# Altium PCB EtherWiz_RiscPC7K.PcbDoc (part 2 of 2)
Units mil, origin at the board's own origin, x right, y up, seen from the top; angles counter-clockwise.
Board outline 2881.89 x 2411.42 mil, 4 copper layers (Top Layer, 5V, GND, Bottom Layer), stack 81.148 mil thick; 69 components, 129 nets, 423 pads, 162 vias.
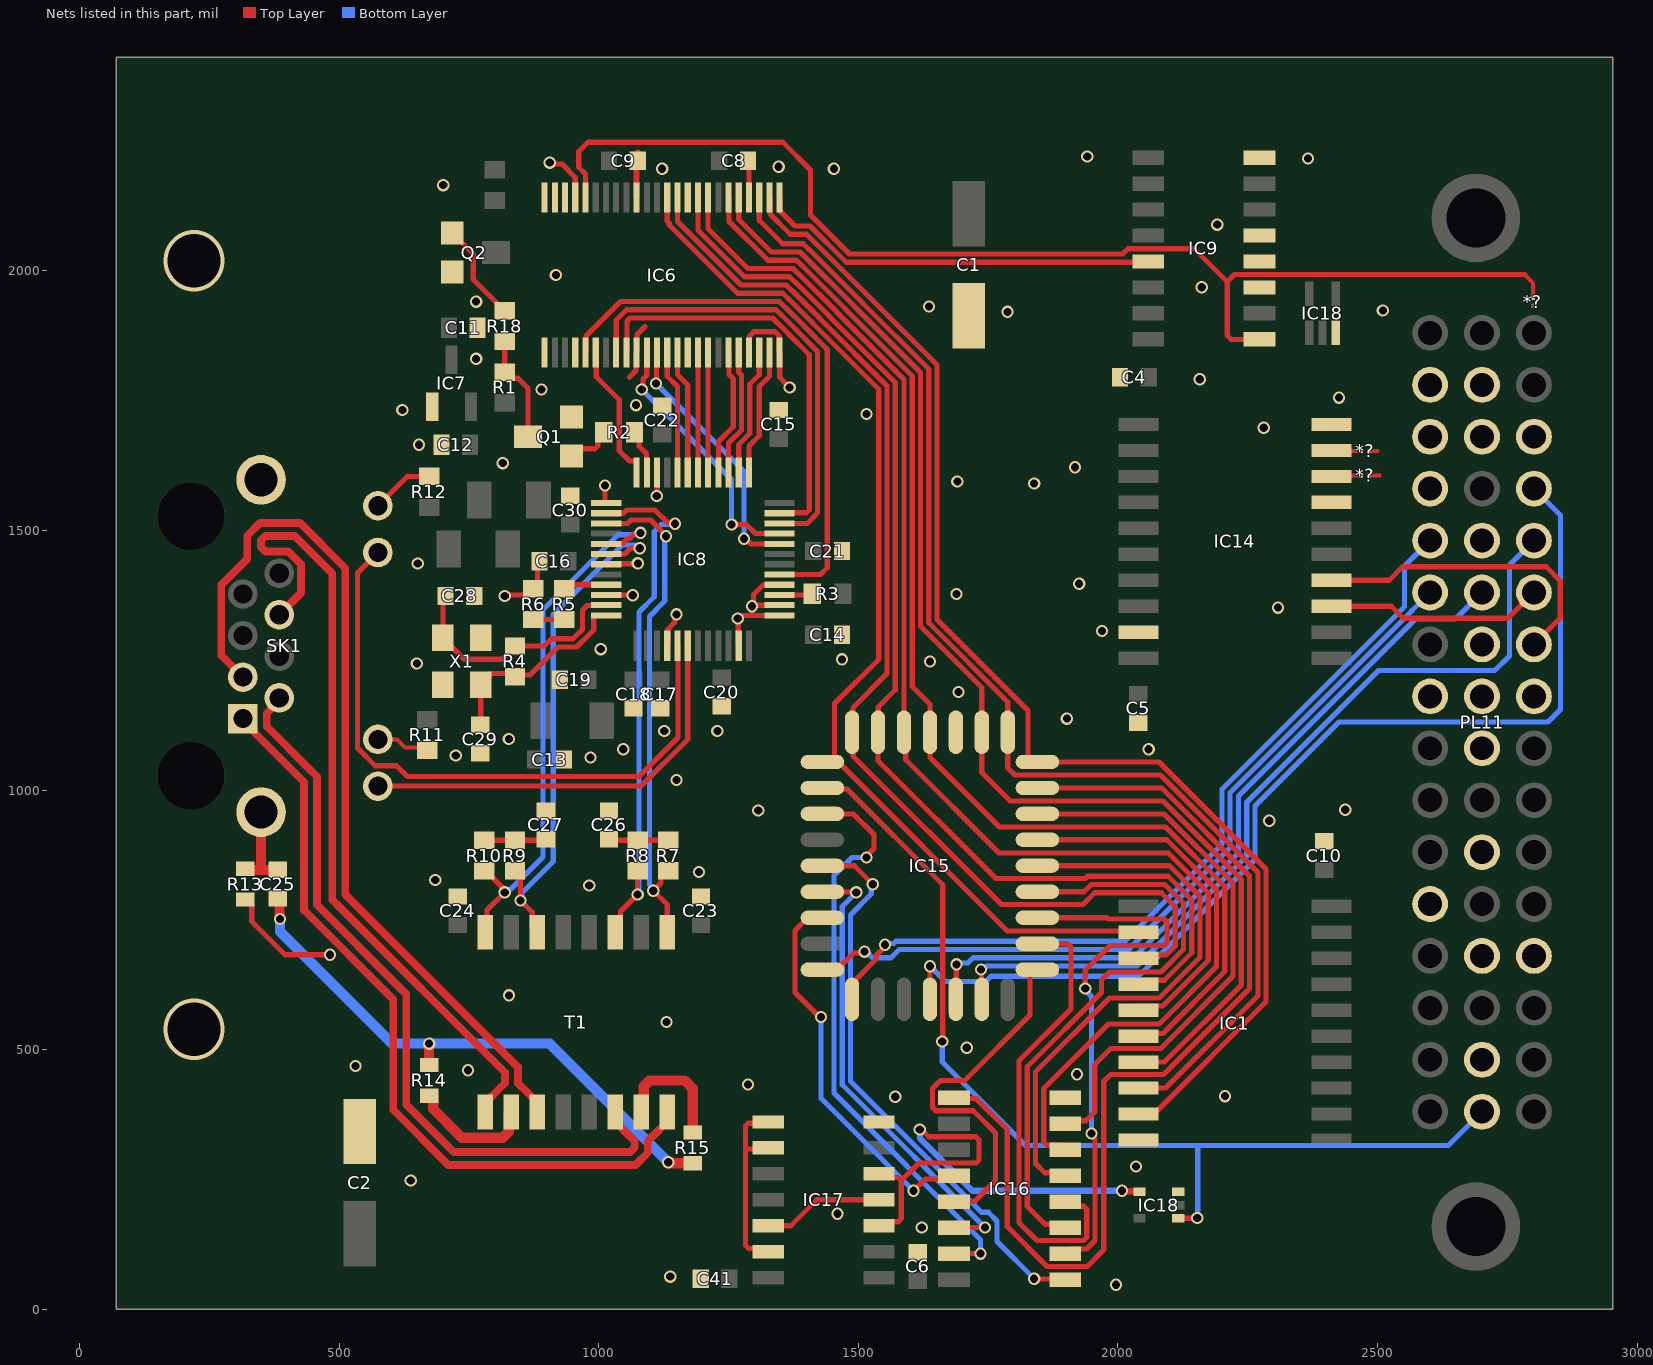
[diagram p4: the nets of this part, all layers, seen from the top]

## Via types
v1: diameter 23.62, hole 15.75, Top Layer to Bottom Layer, tented both sides, 160 vias
v2: diameter 118.11, hole 102.36, Top Layer to Bottom Layer, 2 vias

## Nets (pads, with @x,y where several pads share a name; then routed paths per layer and width w, separated by ;. In a path a pad name is that pad's centre, name@x,y a point inside that pad or via, vN(x,y) a via of type N, cw(c..) or ccw(c..) an arc to the next point about the centre after c; other vN are vias at no path point) (continued)
D0: IC1.9 IC6.2 IC15.13 | length 2447.8
  Top Layer w10: IC6.2@1328.74,2141.26 1329.65,2140.35 1329.65,2109.68 1368.61,2070.71 1400.03,2070.71 1453.87,2016.86 1651.42,1819.32 1651.42,1328.9 1826.77,1153.54 1826.77,1062.44 1834.88,1054.33 2078.93,1054.33 2285.35,847.9 2285.35,592.44 2074.03,381.12 IC1.9@2031.51,381.12
D1: IC1.8 IC6.3 IC15.14 | length 2426.3
  Top Layer w10: IC6.3@1309.06,2141.26 1309.06,2097.87 1354.33,2052.6 1393.86,2052.6 1404.47,2041.99 1405.04,2041.99 1507.48,1939.55 1507.48,1938.98 1635.51,1810.95 1635.51,1322.31 1787.8,1170.03 IC15.14@1787.8,1111.54 1787.8,1042.91 1801.69,1029.02 2081.75,1029.02 2269.45,841.32 2269.45,604.09 2091.54,426.18 IC1.8@2039.37,426.18
D2: IC1.7 IC6.5 IC15.15 | length 2395
  Top Layer w10: IC6.5@1269.69,2141.26 1269.69,2099.27 1332.26,2036.69 1387.27,2036.69 1397.88,2026.08 1398.46,2026.08 1491.57,1932.96 1491.57,1932.39 1619.61,1804.36 1619.61,1315.72 1737.8,1197.53 IC15.15@1737.8,1111.54 1737.8,1033.86 1792.64,979.02 2086.76,979.02 2237.64,828.14 2237.64,624.66 2089.16,476.18 IC1.7@2026.57,476.18
D3: IC1.6 IC6.6 IC15.17 | length 2324.5
  Top Layer w10: IC6.6@1250,2141.26 1250.91,2140.35 1250.91,2095.55 1325.67,2020.79 1380.68,2020.79 1391.29,2010.18 1391.87,2010.18 1475.67,1926.38 1475.67,1925.8 1603.7,1797.77 1603.7,1199.45 1637.8,1165.35 IC15.17@1637.8,1111.54 1637.99,1111.34 1637.99,1062.8 1771.65,929.13 2091.66,929.13 2205.83,814.96 2205.83,650.71 2086.53,531.41 2044.6,531.41 IC1.6@2039.37,526.18
D4: IC1.5 IC6.8 IC15.18 | length 2287
  Top Layer w10: IC6.8@1210.63,2141.26 1210.63,2081.26 1287.01,2004.88 1374.1,2004.88 1384.71,1994.27 1385.28,1994.27 1458.86,1920.69 1458.86,1920.12 1587.8,1791.18 IC15.18@1587.8,1111.54 1591.16,1108.18 1591.16,1058.45 1770.59,879.02 2096.79,879.02 2174.02,801.79 2174.02,671.73 2086.26,583.98 IC1.5@2034.37,583.98
D5: IC1.4 IC6.9 IC15.19 | length 2261.1
  Top Layer w10: IC6.9@1190.94,2141.26 1190.94,2078.45 1280.42,1988.98 1367.51,1988.98 1378.12,1978.37 1378.69,1978.37 1442.95,1914.11 1442.95,1913.53 1571.18,1785.3 1571.18,1193.23 1538.11,1160.15 1538.11,1111.85 IC15.19@1537.8,1111.54 1537.8,1056.69 1764.84,829.65 1937.53,829.65 1941.98,834.09 2011.12,834.09 2083.18,834.09 2096.72,834.09 2142.2,788.61 2142.2,775.07 2142.2,686.88 2089.3,633.98 2034.37,633.98 IC1.4@2032.09,631.7
D6: IC1.3 IC6.11 IC15.20 | length 2243
  Top Layer w10: IC6.11@1151.57,2141.26 1151.57,2095.33 1273.83,1973.07 1360.92,1973.07 1371.53,1962.46 1372.1,1962.46 1427.05,1907.52 1427.05,1906.94 1555.28,1778.71 1555.28,1224.57 1489.48,1158.78 1489.48,1113.22 IC15.20@1487.8,1111.54 1490.15,1109.18 1490.15,1064.96 1775.47,779.65 1932.52,779.65 1955.16,802.28 2083.54,802.28 2110.39,775.43 2110.39,700.06 2092.76,682.42 IC1.3@2032.81,682.42
D7: IC1.2 IC6.12 IC15.21 | length 2076.1
  Top Layer w10: IC6.12@1131.89,2141.26 1131.89,2096.35 1135.67,2092.57 1135.67,2088.74 1267.24,1957.17 1354.33,1957.17 1364.94,1946.55 1365.52,1946.55 1411.14,1900.93 1411.14,1900.35 1539.37,1772.13 1539.37,1251.97 1454.02,1166.61 1454.02,1062.44 1445.9,1054.33 IC15.21@1430.79,1054.33 ; IC15.21@1445.9,1051.09 1464.66,1051.09 1786.73,729.02 2023.74,729.02 IC1.2@2026.57,726.18
ERX_N: IC8.5 R10.2 T1.8 | length 1053.8
  Top Layer w10: R10.2@779.53,844.49 782.48,844.49 816.29,810.68 816.29,805.76 v1(818.9,803.15) 784.73,768.98 784.73,729.42 T1.8@781.69,726.38 ; IC8.5@1014.25,1474.41 1015.16,1475.31 1045.84,1475.31 1054.01,1483.49 1058.4,1483.49 1067.9,1492.99 1077.81,1492.99 v1(1080.42,1495.6)
  Bottom Layer w10: v1(818.9,803.15) 822.58,803.15 828.78,809.35 830.62,809.35 892.47,871.2 892.47,1347.44 1036.99,1491.96 1066.86,1491.96 1067.9,1492.99 1077.81,1492.99 v1(1080.42,1495.6)
ERX_P: IC8.6 R9.2 T1.6 | length 1001.8
  Top Layer w10: R9.2@840.94,839.41 842.38,839.41 849.04,832.76 v1(849.04,787.69) 871.73,764.99 871.73,736.34 T1.6@881.69,726.38 ; IC8.6@1014.25,1454.72 IC8.6@1014.25,1454.72 1050.35,1454.78 1061.35,1465.78 1078.6,1465.78 v1(1078.93,1466.11)
  Bottom Layer w10: v1(849.04,787.69) 851.64,790.29 851.64,802.09 912.47,862.91 912.47,1339.15 1045.27,1471.96 1069.4,1471.96 1075.25,1466.11 v1(1078.93,1466.11)
ETX_N: IC8.2 R8.2 T1.3 | length 1040.3
  Top Layer w10: IC8.2@1014.25,1533.46 1047.66,1533.46 1054.05,1539.85 1107.74,1539.85 1133.17,1514.42 1145.35,1514.42 v1(1146.61,1513.16) ; T1.3@1031.69,726.38 1041.65,736.33 1041.65,766.06 v1(1074.8,799.21) R8.2@1074.8,844.49
  Bottom Layer w10: v1(1074.8,799.21) 1077.41,801.82 1077.41,1342.86 1106.93,1372.38 1106.93,1498.4 1120.24,1511.71 1145.17,1511.71 v1(1146.61,1513.16)
ETX_P: IC8.3 R7.2 T1.1 | length 973.2
  Top Layer w10: IC8.3@1014.25,1513.78 1055.82,1513.78 1062.21,1520.17 1099.58,1520.17 1118.86,1500.89 1118.86,1500.75 1129.65,1489.96 v1(1129.65,1488.99) ; T1.1@1131.69,726.38 1131.69,779.76 v1(1105.07,806.38) 1119.7,821.01 1119.7,832.76 1131.43,844.49 R7.2@1133.86,844.49
  Bottom Layer w10: v1(1105.07,806.38) 1105.07,810.07 1097.41,817.73 1097.41,1334.57 1126.93,1364.09 1126.93,1476.64 1127.04,1476.75 1127.04,1486.39 v1(1129.65,1488.99)
GND: *?.1@2483.5,1606.3 *?.1@2483.5,1653.54 C1.2 C2.2 C4.1 C5.1 C6.1 C8.1 C9.1 C10.1 C11.1 C12.1 C13.1 C14.1 C15.1 C16.1 C17.1 C18.1 C19.1 C20.1 C21.1 C22.1 C23.1 C24.1 C26.1 C27.1 C28.1 C29.1 C30.1 C41.1 IC1.10 IC6.4 IC6.10 IC6.15 IC6.21 IC6.22 IC6.23 IC6.24 IC6.25 IC6.28 IC6.34 IC6.39 IC6.45 IC6.48 IC7.1 IC8.1 IC8.7 IC8.10 IC8.16 IC8.23 IC8.25 IC8.26 IC8.28 IC8.46 IC9.3 IC9.4 IC9.5 IC9.8 IC14.10 IC14.19 IC15.16 IC16.8 IC17.7 IC18.3 PL11.B2 PL11.B5 PL11.B7 PL11.B9 PL11.B11 PL11.B13 PL11.B15 Q1.2 Q2.2 R6.1 R13.1 X1.2 X1.4 | length 1499
  Top Layer w7.87: *?.1@2483.5,1606.3 2503.94,1606.3 ; *?.1@2483.5,1653.54 2500,1653.54
  Top Layer w10: R13.1@318.9,789.37 322.83,789.37 331.61,780.59 331.61,747.13 395.74,683 v1(482.21,683) ; v1(818.9,1374.02) 820.94,1376.06 862.28,1376.06 R6.1@874.02,1387.8 881.89,1395.67 C16.1@881.89,1440.94 ; v1(905.51,2208.66) 908.12,2206.05 928.93,2206.05 954.72,2180.26 IC6.21@954.72,2141.26 ; v1(1011.81,1586.61) 1011.81,1554.06 1012.72,1553.15 IC8.1@1014.25,1553.15 ; IC8.10@1014.25,1375.98 1014.57,1375.66 1065.26,1375.66 v1(1065.59,1375.34) ; IC8.7@1014.25,1435.04 1015.14,1435.93 1074.35,1435.93 v1(1075.24,1436.81) ; 1059.06,1795.28 1071.93,1808.15 1071.93,1842.09 IC6.34@1072.83,1842.99 1073.74,1843.9 1073.74,1877.93 1088.96,1893.15 ; v1(1111.75,1566.74) 1111.98,1566.97 1111.98,1611.51 IC8.46@1112.2,1611.73 ; IC8.16@1131.89,1278.03 1132.8,1278.94 1132.8,1309.62 1147,1323.82 1147,1335.98 v1(1149.61,1338.58) ; IC8.23@1269.69,1278.03 1268.78,1278.94 1268.78,1329.65 v1(1267.72,1330.71) 1271.4,1330.71 1277.31,1336.61 1295.28,1336.61 ; C8.1@1287.4,2212.6 1289.37,2210.63 IC6.4@1289.37,2141.26 ; IC6.45@1289.37,1842.99 1290.28,1843.9 1290.28,1874.58 1298.63,1882.93 1339.16,1882.93 1347.52,1874.58 1347.52,1843.9 IC6.48@1348.43,1842.99 1348.43,1794.67 v1(1367.57,1775.53) ; IC8.25@1347.95,1336.61 1295.28,1336.61 ; IC8.26@1347.95,1356.3 1297.24,1356.3 v1(1295.28,1354.33) ; IC8.28@1347.95,1395.67 1347.05,1394.76 1316.37,1394.76 1297.88,1376.28 1297.88,1356.94 v1(1295.28,1354.33) ; 1295.28,1336.61 v1(1295.28,1354.33)
  Top Layer w11.81: IC6.15@1072.83,2141.26 C9.1@1072.83,2214.57 ; C9.1@1074.8,2228.35 C9.1@1080.71,2222.44
  other v1: 1996.06,47.24 1137.8,62.99 1622.05,157.48 1459.72,183.96 637.8,248.03 2034.75,275.31 1570.87,409.45 2205.95,410.63 1287.4,433.07 1921.26,452.76 748.03,460.63 531.5,468.5 1708.66,503.94 1130.27,553.61 827.12,604.79 981.54,816.15 685.04,826.77 1192.91,842.52 2291.34,940.94 1307.09,960.63 2437.64,962.13 1149.61,1019.68 984.25,1062.99 724.41,1066.93 1047.24,1078.74 2059.06,1078.74 826.77,1098.43 1125.98,1114.17 1228.35,1114.17 1901.57,1137.8 1692.91,1188.98 649.61,1244.09 1637.8,1248.03 1468.5,1251.97 1003.94,1271.65 1969.1,1306.67 2308.32,1351.58 1688.98,1377.95 1925.2,1397.64 651.35,1436.51 1838.58,1590.55 1690.63,1594.67 1917.32,1622.05 814.96,1629.92 653.54,1665.35 2280.76,1698.04 1515.55,1724.41 621.68,1732.24 1071.49,1741.58 2425.79,1756.01 889.76,1771.65 2157.48,1791.34 763.78,1830.71 1787.4,1921.26 2510.21,1923.87 1636.2,1931.74 763.78,1940.94 2161.42,1968.5 917.32,1992.13 2191.32,2089.22 700.42,2165.31 1122.05,2196.85 1452.76,2196.85 1346.46,2200.79 2366.14,2216.54 1940.94,2220.47
GND_CHASS: C25.1 R13.2 SK1.S1 SK1.S2 | length 159.6
  Top Layer w19.68: R13.2@316.93,846.46 349.61,846.46 358.27,846.46 C25.1@374.02,846.46 ; 349.61,855.12 SK1.S2@349.61,957.68
  other v2: 220.47,539.37 220.47,2019.69
INT_3v3: Q2.1 R18.2 | length 193.3
  Top Layer w10: Q2.1@717.84,2072.93 758.27,2032.51 758.27,1983.86 804.21,1937.91 804.21,1934.96 815.94,1923.23 R18.2@818.9,1923.23
INT_Read_nEN: 
LA2: IC14.3 PL11.C6 | length 420
  Top Layer w10: IC14.3@2411.42,1354.33 2526.22,1354.33 2549.5,1331.05 2751.52,1331.05 PL11.C6@2801.18,1380.71
LA3: IC14.4 PL11.C7 | length 606
  Top Layer w10: IC14.4@2411.42,1404.33 2522.44,1404.33 2548.31,1430.2 2824.87,1430.2 2852.06,1403.01 2852.06,1331.59 PL11.C7@2801.18,1280.71
LA4: IC15.29 PL11.A6 | length 1543.4
  Top Layer w10: IC15.29@1430.79,654.33 1459.02,654.33 1491.06,686.37 1509.2,686.37 v1(1511.81,688.98)
  Bottom Layer w10: v1(1511.81,688.98) 1515.5,688.98 1527.31,677.17 1562.99,677.17 1578.9,693.07 1733.54,693.07 1733.7,693.23 2020.16,693.23 2216.06,889.13 2216.06,995.04 2566,1344.97 2566,1345.52 PL11.A6@2601.18,1380.71
LA5: IC15.3 PL11.C5 | length 1628.2
  Top Layer w10: v1(1736.22,654.45) 1737.01,653.66 1737.01,597.91 IC15.3@1737.8,597.13
  Bottom Layer w10: v1(1736.22,654.45) 1739.91,654.45 1746.88,661.42 2036.56,661.42 2247.87,872.73 2247.87,976.22 2279.37,1007.72 2502.03,1230.38 2725.63,1230.38 2753.91,1258.65 2753.91,1433.43 PL11.C5@2801.18,1480.71
LA6: IC15.2 PL11.B6 | length 1440.6
  Top Layer w10: IC15.2@1687.8,597.13 1688.39,597.72 1688.39,663.86 v1(1688.98,664.45)
  Bottom Layer w10: v1(1688.98,664.45) 1691.58,667.06 1710.68,667.06 1720.79,677.17 1740.13,677.17 1740.29,677.32 2029.97,677.32 2231.97,879.32 2231.97,988.45 2573.14,1329.62 2650.09,1329.62 PL11.B6@2701.18,1380.71
LA7: IC15.30 PL11.A5 | length 1611.5
  Top Layer w10: IC15.30@1487.8,597.13 1487.8,627.77 1534.19,674.17 1534.19,681.49 1551.18,698.48 v1(1551.18,702.17)
  Bottom Layer w10: v1(1551.18,702.17) 1553.79,704.77 1568.1,704.77 1572.31,708.98 1726.95,708.98 1727.11,709.13 2013.57,709.13 2200.16,895.72 2200.16,1001.63 2551.98,1353.45 2551.98,1431.51 PL11.A5@2601.18,1480.71
LA8: IC15.1 PL11.C4 | length 2014.6
  Top Layer w10: IC15.1@1637.8,597.13 v1(1637.81,660.92)
  Bottom Layer w10: v1@1637.8,661.42 1660.96,638.26 1667.48,631.73 1745.63,631.73 1755.63,641.73 2039.37,641.73 2263.78,866.14 2263.78,969.63 2425.73,1131.58 2828.44,1131.58 2852.27,1155.41 2852.27,1529.62 PL11.C4@2801.18,1580.71
LA9: PL11.A4
LA12: *?.2@2468.5,1653.54 IC14.9 | length 57.4
  Top Layer w7.87: IC14.9@2412.2,1653.54 *?.2@2468.5,1653.54
  Top Layer w10: IC14.9@2411.42,1654.33 IC14.9@2412.2,1653.54
LA13: *?.2@2468.5,1606.3 IC14.8 | length 57.9
  Top Layer w7.87: IC14.8@2413.39,1606.3 *?.2@2468.5,1606.3
  Top Layer w10: IC14.8@2411.42,1604.33 IC14.8@2413.39,1606.3
LINK: IC8.17 SK1.11 | length 1241.2
  Top Layer w10: SK1.11@574.57,1457.76 535.16,1418.35 535.16,1081.43 569.42,1047.17 610.32,1047.17 631.42,1026.06 1077.24,1026.06 1152.48,1101.3 1152.48,1277.13 IC8.17@1151.57,1278.03
NetC25_2: C25.2 R14.1 R15.1 | length 1086.3
  Top Layer w19.68: C25.2@381.89,791.34 385.07,788.15 385.07,752.72 v1(385.83,751.97) ; R14.1@673.23,470.47 v1(673.23,511.81) ; v1(1133.86,283.46) 1134.92,283.46 1136.89,281.5 R15.1@1181.1,281.5
  Bottom Layer w19.68: v1(385.83,751.97) 385.83,728.35 602.36,511.81 v1(673.23,511.81) 905.51,511.81 v1(1133.86,283.46)
NetC26_2: C26.2 R7.1 R8.1 | length 118.9
  Top Layer w10: C26.2@1015.75,905.51 1017.72,903.54 R8.1@1074.8,903.54 R7.1@1133.86,903.54
NetC27_2: C27.2 R9.1 R10.1 | length 102.4
  Top Layer w10: R10.1@779.53,903.54 830.71,903.54 C27.2@881.89,903.54
NetC28_2: C28.2 IC8.11 R4.2 X1.1 | length 481
  Top Layer w10: C28.2@704.72,1374.02 699.8,1369.09 X1.1@699.8,1293.31 741.14,1251.97 812.99,1251.97 823.9,1262.87 823.9,1265.83 835.63,1277.56 894.98,1277.56 908.91,1291.5 950.62,1291.5 968.5,1309.38 968.5,1346.46 977.44,1355.39 1013.35,1355.39 IC8.11@1014.25,1356.3
NetC29_2: C29.2 IC8.12 R4.1 X1.3 | length 397.9
  Top Layer w10: C29.2@771.65,1125.98 772.64,1126.97 772.64,1207.68 788.31,1223.35 793.1,1223.35 794.16,1224.41 832.68,1224.41 R4.1@838.58,1218.5 841.82,1221.74 867.41,1221.74 921.26,1275.59 957.21,1275.59 990.22,1308.6 990.22,1335.71 991.12,1336.61 IC8.12@1014.25,1336.61
NetIC8_9: IC8.9 R5.2 | length 84.4
  Top Layer w10: R5.2@933.07,1387.8 940.94,1395.67 IC8.9@1014.25,1395.67
NetIC8_27: IC8.27 R3.1 | length 68.2
  Top Layer w10: IC8.27@1347.95,1375.98 1413.39,1375.98 R3.1@1415.35,1374.02
NetIC8_47: IC8.47 R2.1 | length 89.2
  Top Layer w10: R2.1@1062.99,1687.01 1065.94,1687.01 1077.68,1675.28 1077.68,1662.48 1091.61,1648.54 1091.61,1612.64 IC8.47@1092.52,1611.73
NetIC17_3: IC17.3 IC17.5 IC18.4@2041.34,226.38 | length 980.1
  Top Layer w10: IC17.3@1539.86,161.02 1547.66,168.82 1576.82,168.82 1582.68,174.68 1582.68,248.03 ; IC17.5@1539.86,261.02 1546.96,253.92 1576.79,253.92 1582.68,248.03 ; v1(1618.11,346.46) 1621.8,346.46 1635.65,332.6 1726.43,332.6 1732.28,326.74 1732.28,287.83 1726.43,281.97 1616.61,281.97 1582.68,248.03
  Top Layer w11.81: v1(2007.87,228.35) 2008.86,227.36 2040.35,227.36 IC18.4@2041.34,226.38
  Bottom Layer w11.81: v1(1618.11,346.46) 1618.82,345.75 1618.82,329.03 1719.5,228.35 v1(2007.87,228.35)
NetIC17_4: IC17.4 IC17.12 | length 234.3
  Top Layer w10: IC17.12@1326.32,161.02 1369.68,161.02 1419.68,211.02 IC17.4@1539.86,211.02
NetIC17_8: IC17.8 IC17.9 IC17.13 | length 369.8
  Top Layer w10: IC17.13@1326.32,111.02 1319.92,117.43 1288.69,117.43 1282.83,123.28 1282.83,309.1 ; IC17.9@1326.32,311.02 1324.4,309.1 1282.83,309.1 ; IC17.8@1326.32,361.02 1323.56,358.27 1287.4,358.27 1282.83,353.7 1282.83,309.1
NetQ1_1: Q1.1 R2.2 | length 90.7
  Top Layer w10: Q1.1@947.92,1640.07 947.92,1640.89 964.51,1657.48 992.13,1657.48 998.11,1663.46 998.11,1677.24 R2.2@1009.84,1688.98
NetQ1_3: Q1.3 R1.1 R18.1 | length 209.9
  Top Layer w10: R18.1@818.9,1864.17 R1.1@818.9,1805.12 830.63,1793.39 844.41,1793.39 863.51,1774.28 Q1.3@863.51,1680.85
NetR5_1: R5.1 R6.2 | length 59.1
  Top Layer w10: R6.2@874.02,1328.74 R5.1@933.07,1328.74
NetR11_1: R11.1 SK1.10 | length 103.4
  Top Layer w7.87: SK1.10@574.57,1097.76 610.91,1097.76 626.66,1082 664.06,1082 R11.1@669.29,1076.77
NetR12_1: R12.1 SK1.12 | length 122.1
  Top Layer w10: SK1.12@574.57,1547.76 631.14,1604.33 R12.1@673.23,1604.33
NetR14_2: R14.2 T1.10 | length 244
  Top Layer w19.68: R14.2@673.23,411.42 677.17,411.42 681.1,407.48 681.1,385.83 736.22,330.71 815.04,330.71 826.57,342.24 826.57,374.8 T1.10@831.69,379.92
NetR15_2: R15.2 T1.15 | length 241.8
  Top Layer w19.68: T1.15@1081.69,379.92 1086.81,385.04 1086.81,429.41 1098.34,440.94 1165.35,440.94 1181.1,425.2 R15.2@1181.1,340.55
PR/W: IC14.7
Psp1: PL11.C13
Psp2: PL11.A12
Psp3: PL11.A8
Psp4: PL11.B8
Psp5: PL11.C8
Psp6: PL11.A3
Psp7: PL11.B3
Psp8: PL11.C3
Ready: PL11.A2
ROM_Latch_nEN: 
ROM_Latch_nSel: 
ROM_nCS: IC15.22 IC18.1@2116.14,175.2 PL11.B16 | length 1959.4
  Top Layer w10: IC15.22@1430.79,1004.33 1432.65,1002.46 1477.85,1002.46 1662.48,817.83 1662.48,516.81 v1(1661.42,515.75) ; IC18.1@2116.14,175.2 2116.42,175.48 2152.41,175.48 v1(2152.69,175.76)
  Bottom Layer w10: v1(1661.42,515.75) 1661.42,476.38 1821.93,315.87 2153.54,315.87 ; v1@2153.54,177.17 2153.54,315.87 ; PL11.B16@2701.18,380.71 2636.34,315.87 2153.54,315.87
ROMA0: IC15.12 IC16.9 | length 1920.8
  Top Layer w10: IC16.9@1684.06,407.28 1685.13,406.21 1726.52,406.21 1786.58,346.15 1786.58,159.61 1863.59,82.6 1940.87,82.6 1972.44,114.17 1972.44,438.65 1986.27,452.48 2087.95,452.48 2253.54,618.07 2253.54,628.76 2253.54,834.73 2084.33,1003.94 1845.2,1003.94 IC15.12@1844.8,1004.33
ROMA1: IC15.11 IC16.7 | length 1105.9
  Top Layer w10: IC15.11@1844.8,954.33 2088.95,954.33 2221.73,821.55 2221.73,641.94 2082.27,502.48 1986.27,502.48 1955.2,471.41 1955.2,380.4 1938.11,363.3 1904.64,363.3 IC16.7@1898.62,357.28
ROMA2: IC15.10 IC16.6 | length 1114.1
  Top Layer w10: IC15.10@1844.8,904.33 2093.96,904.33 2189.92,808.37 2189.92,660.13 2079.67,549.88 1981.51,549.88 1857.2,425.58 1857.2,321.92 1863.06,316.06 1889.84,316.06 IC16.6@1898.62,307.28
ROMA3: IC15.9 IC16.5 | length 1106.8
  Top Layer w10: IC15.9@1844.8,854.33 2098.98,854.33 2158.11,795.2 2158.11,678.32 2079.67,599.88 1983.67,599.88 1841.3,457.51 1841.3,280.75 1858.97,263.08 1892.83,263.08 IC16.5@1898.62,257.28
ROMA4: IC15.8 IC16.3 | length 1158.9
  Top Layer w10: IC15.8@1844.8,804.33 1934.71,804.33 1948.57,818.19 2004.53,818.19 2076.6,818.19 2090.13,818.19 2126.3,782.02 2126.3,768.49 2126.3,693.47 2082.71,649.88 1983.67,649.88 1968.5,634.71 1968.5,610.24 1825.39,467.13 1825.39,198.23 1859.73,163.89 1892.01,163.89 IC16.3@1898.62,157.28
ROMA5: IC15.7 IC16.2 | length 1068.6
  Top Layer w10: IC15.7@1844.8,754.33 1978.76,754.33 1981.12,751.97 2088.63,751.97 2094.49,746.11 2094.49,706.65 2088.63,700.79 1984.58,700.79 1937.01,653.22 v1(1937.01,618.11) ; IC16.2@1898.62,107.28 1907.4,116.06 1939.61,116.06 1955.94,132.4 1955.94,327.77 1948.82,334.9 v1(1948.82,338.58)
  Bottom Layer w10: v1(1937.01,618.11) 1937.01,614.42 1948.82,602.61 v1(1948.82,338.58)
ROMA6: IC15.6 IC16.4 | length 888.6
  Top Layer w10: IC15.6@1844.8,704.33 1903.59,704.33 1909.45,698.47 1909.45,578.74 1809.49,478.78 1809.49,166.89 1843.78,132.6 1933.65,132.6 1940.04,138.99 1940.04,192.65 1934.18,198.5 1907.4,198.5 IC16.4@1898.62,207.28
ROMA7: IC15.5 IC16.13 | length 710.4
  Top Layer w10: IC16.13@1684.06,207.28 1684.73,207.96 1723.71,207.96 1764.09,248.35 1764.09,339.92 1721.41,382.6 1649.03,382.6 1642.64,388.99 1642.64,425.58 1658,440.94 1704.72,440.94 1830.71,566.93 1830.71,646.22 1838.82,654.33 IC15.5@1844.8,654.33
ROMA8: IC15.27 IC16.12 | length 750.6
  Top Layer w10: v1(1428.23,562.99) 1425.2,562.99 1377.87,610.32 1377.87,729.65 1402.56,754.33 IC15.27@1430.79,754.33 ; v1(1606.3,228.35) 1629.07,251.12 1677.89,251.12 IC16.12@1684.06,257.28
  Bottom Layer w10: v1(1428.23,562.99) 1428.23,406.42 v1(1606.3,228.35)
ROMA9: IC15.26 IC16.14 | length 896.9
  Top Layer w10: IC15.26@1430.79,804.33 1431.38,803.74 1495.47,803.74 v1(1496.06,803.15) ; IC16.14@1684.06,157.28 1684.15,157.38 1744,157.38 v1(1744.09,157.48)
  Bottom Layer w10: v1(1496.06,803.15) 1468.82,775.91 1468.82,432.76 v1(1744.09,157.48)
ROMA10: IC15.23 IC16.15 | length 1139.4
  Top Layer w10: IC15.23@1430.79,954.33 1490.21,954.33 1529.91,914.64 1529.91,887.92 1515.75,873.76 v1(1515.75,870.08) ; IC16.15@1684.06,107.28 v1(1735.24,107.28)
  Bottom Layer w10: v1(1515.75,870.08) 1487.56,870.08 1452.91,835.43 1452.91,416.54 1735.24,134.21 v1(1735.24,107.28)
ROMA11: IC15.25 IC16.1 | length 1104
  Top Layer w10: IC15.25@1430.79,854.33 1492.13,854.33 v1(1527.56,818.9) ; v1(1838.58,59.06) 1839.47,58.17 1897.74,58.17 IC16.1@1898.62,57.28
  Bottom Layer w10: v1(1527.56,818.9) 1524.95,816.29 1524.95,799.91 1484.72,759.69 1484.72,439.34 1737.2,186.86 1750.14,186.86 1766.81,170.2 1766.81,130.83 v1(1838.58,59.06)
RX_N: SK1.6 T1.9 | length 1580.3
  Top Layer w15: SK1.6@384.57,1337.76 426.48,1379.67 426.48,1435.12 401.93,1459.67 357.92,1459.67 349.13,1468.45 349.13,1480.88 357.92,1489.67 414.35,1489.67 486.81,1417.21 486.81,788.78 501.46,774.13 819.19,456.4 819.19,435.58 810.41,426.79 810.06,426.79 781.69,398.43 T1.9@781.69,379.92
RX_P: SK1.3 T1.11 | length 1746.7
  Top Layer w15: SK1.3@314.57,1217.76 272.66,1259.67 272.66,1395.12 322.83,1445.29 322.83,1489.94 347.56,1514.67 424.71,1514.67 511.81,1427.56 511.81,799.13 844.19,466.75 844.19,435.58 852.98,426.79 853.33,426.79 881.69,398.43 T1.11@881.69,379.92
SPEED: IC8.18 SK1.9 | length 814.3
  Top Layer w10: SK1.9@574.57,1007.76 1081.43,1007.76 1171.26,1097.59 IC8.18@1171.26,1278.03
TX_N: SK1.2 T1.14 | length 1470
  Top Layer w15: SK1.2@384.57,1177.76 384.57,1172.13 360.4,1147.96 360.4,1122.85 442.82,1040.43 457.46,1025.79 457.46,778.76 614.31,621.91 628.96,607.26 628.96,394.67 720.57,303.05 1060.41,303.05 1069.19,311.84 1069.19,324.26 1060.41,333.05 1060.06,333.05 1031.69,361.42 T1.14@1031.69,379.92
TX_P: SK1.1 T1.16 | length 1511.4
  Top Layer w15: SK1.1@314.57,1137.76 335.4,1116.92 335.4,1112.49 432.46,1015.43 432.46,768.4 603.96,596.91 603.96,384.31 710.22,278.05 1070.76,278.05 1094.19,301.48 1094.19,324.26 1102.98,333.05 1103.33,333.05 1131.69,361.42 T1.16@1131.69,379.92
Wiz5_PR/W: IC6.1 IC9.13 | length 776.6
  Top Layer w10: IC6.1@1348.43,2141.26 1349.33,2140.35 1349.33,2115.24 1377.95,2086.61 1406.62,2086.61 1476.48,2016.75 2056.51,2016.75 IC9.13@2058.07,2018.31
Wiz_A0: IC6.36 IC8.32 | length 502.2
  Top Layer w10: v1(1110.24,1783.46) 1111.3,1784.53 1111.3,1842.09 IC6.36@1112.2,1842.99 ; v1(1279.53,1484.25) 1283.21,1484.25 1293.06,1474.41 IC8.32@1347.95,1474.41
  Bottom Layer w10: v1(1110.24,1783.46) 1279.53,1614.17 v1(1279.53,1484.25)
Wiz_A1: IC6.35 IC8.33 | length 506.4
  Top Layer w10: v1(1082.68,1771.65) 1085.28,1774.26 1085.28,1791.72 1092.52,1798.96 IC6.35@1092.52,1842.99 ; v1(1255.91,1511.81) 1284.09,1511.81 1301.81,1494.09 IC8.33@1347.95,1494.09
  Bottom Layer w10: v1(1082.68,1771.65) 1255.91,1598.42 v1(1255.91,1511.81)
Wiz_D0: IC6.47 IC8.37 | length 247.6
  Top Layer w10: IC8.37@1289.37,1611.73 1289.37,1662.83 1309.06,1682.52 1309.06,1777.56 1328.74,1797.24 IC6.47@1328.74,1842.99
Wiz_D1: IC6.46 IC8.38 | length 247.6
  Top Layer w10: IC8.38@1269.69,1611.73 1269.69,1665.64 1290.75,1686.71 1290.75,1781.75 1309.06,1800.05 IC6.46@1309.06,1842.99
Wiz_D2: IC6.44 IC8.39 | length 243.7
  Top Layer w10: IC8.39@1250,1611.73 1250,1668.45 1274.84,1693.29 1274.84,1799.46 1269.69,1804.62 IC6.44@1269.69,1842.99
Wiz_D3: IC6.43 IC8.40 | length 246.8
  Top Layer w10: IC8.40@1230.32,1611.73 1230.32,1671.26 1258.94,1699.88 1258.94,1792.87 1250.91,1800.91 1250.91,1842.09 IC6.43@1250,1842.99
Wiz_D4: IC6.41 IC8.41 | length 231.3
  Top Layer w10: IC8.41@1210.63,1611.73 IC6.41@1210.63,1842.99
Wiz_D5: IC6.40 IC8.42 | length 231.3
  Top Layer w10: IC8.42@1190.94,1611.73 IC6.40@1190.94,1842.99
Wiz_D6: IC6.38 IC8.43 | length 239.4
  Top Layer w10: IC6.38@1151.57,1842.99 1151.57,1800.05 1171.26,1780.37 IC8.43@1171.26,1611.73
Wiz_D7: IC6.37 IC8.44 | length 239.4
  Top Layer w10: IC6.37@1131.89,1842.99 1131.89,1797.24 1151.57,1777.56 IC8.44@1151.57,1611.73
Wiz_nRD: IC6.32 IC8.34 | length 885.5
  Top Layer w10: IC6.32@1033.46,1842.99 1033.46,1905.49 1053.32,1925.35 1077.22,1925.35 1077.37,1925.51 1103.73,1925.51 1103.89,1925.35 1341.15,1925.35 1351.76,1914.74 1352.34,1914.74 1379.33,1887.75 1379.33,1887.18 1421.42,1845.09 1421.42,1533.64 1401.56,1513.78 IC8.34@1347.95,1513.78
Wiz_nRst: IC6.30 IC8.48 | length 271.5
  Top Layer w10: IC6.30@994.09,1842.99 995,1842.09 995,1796.34 1039.37,1751.97 1039.37,1653.54 1058.93,1633.98 1071.93,1633.98 1072.83,1633.08 IC8.48@1072.83,1611.73
Wiz_nSel: IC6.29 IC8.29 | length 1081
  Top Layer w10: IC6.29@974.41,1842.99 975.32,1843.9 975.32,1874.58 1042,1941.26 1070.63,1941.26 1070.79,1941.42 1110.32,1941.42 1110.47,1941.26 1347.74,1941.26 1358.35,1930.65 1358.93,1930.65 1395.24,1894.34 1395.24,1893.77 1440.04,1848.96 1440.04,1428.51 1426.89,1415.35 IC8.29@1347.95,1415.35
Wiz_nSel5: *?.1@2799.21,1948.07 IC6.20 IC9.1 | length 2319.5
  Top Layer w7.87: 2783.35,1992.99 2799.21,1977.13 *?.1@2799.21,1948.07
  Top Layer w10: IC6.20@974.41,2141.26 974.41,2186.76 961.54,2199.64 961.54,2230.05 979.36,2247.87 1354.49,2247.87 1407.77,2194.59 1407.77,2107.98 1483.09,2032.66 2009.03,2032.66 2019.37,2042.99 2146.86,2042.99 2210.63,1979.22 ; IC9.1@2272.64,1868.31 2218.31,1868.31 2210.63,1875.98 2210.63,1979.22 ; 2783.35,1992.99 2224.4,1992.99 2210.63,1979.22
Wiz_nWR: IC6.33 IC8.35 | length 803.3
  Top Layer w10: IC6.33@1053.15,1842.99 1054.06,1843.9 1054.06,1903.59 1059.91,1909.45 1083.81,1909.45 1083.96,1909.61 1097.14,1909.61 1097.3,1909.45 1334.57,1909.45 1345.18,1898.84 1345.75,1898.84 1363.43,1881.16 1363.43,1880.59 1405.51,1838.5 1405.51,1540.23 1399.65,1534.37 1348.86,1534.37 IC8.35@1347.95,1533.46
pads on no net: IC6.26 IC6.27 IC8.19 IC8.20 IC8.21 IC8.30 IC9.7 IC9.9 IC9.10 IC9.11 IC9.12 IC9.14 IC9.15 IC18.1@2368.3,1881.25 PL11.MH1 PL11.MH2 SK1. SK1.4 SK1.5 SK1.7 SK1.8 T1.4 T1.5 T1.12 T1.13

## Polygon pours and split planes (outlines as drawn)
GND_CHASS on Bottom Layer "NONET_L-01_P-001" (solid, remove dead copper, pour order 1): 75.05,3.94 480.32,3.94 480.32,2411.42 70.87,2411.42
GND on Bottom Layer "NONET_L-01_P-001" (solid, remove dead copper, pour order 6): 70.87,9.76 2952.78,0 2952.76,2411.42 70.87,2411.42
GND on GND "NONET_L-01_P-001" (solid, pour order 4): 70.87,0 2952.76,0 2952.76,2259.84 2801.18,2411.42 70.87,2411.42
3v3 on 5V "NONET_L-01_P-001" (solid, remove dead copper, pour order 2): 665.35,1804.27 665.35,1039.37 1496.06,1039.37 1496.06,1812.41
5V on 5V "NONET_L-01_P-001" (solid, pour order 3): 70.87,0 2948.82,0 2952.76,3.94 2952.76,2411.42 70.87,2411.42
GND_CHASS on Top Layer "NONET_L-01_P-001" (solid, remove dead copper, pour order 0): 70.87,0 464.57,0 464.57,2411.42 70.87,2411.42
1v2d on Top Layer "NONET_L-01_P-001" (solid, remove dead copper, pour order 5): 1047.24,1318.9 1051.18,1314.96 1311.02,1314.96 1311.02,1574.8 1047.24,1574.8
GND on Top Layer "NONET_L-01_P-001" (solid, remove dead copper, pour order 7): 70.87,0 2952.76,0 2952.76,2411.42 70.87,2411.42

## Keep-outs
Keep-Out Layer:
  lines w10: 70.87,0 2952.76,0 2952.76,2409.45 70.87,2409.45 70.87,0

## Other copper
Top Layer:
  text ".Project_Title" at 2482.44,2321.02 h60

## Silkscreen, mask and mechanical layers (free items; w line width, h text height)
Top Overlay:
  text "(C) IanJ '26" at 1569.06,2317.09 h40
  text ".Project_Title" at 405.51,2279.53 h78.74
  text ".PCB_RevNo" at 1062.99,2279.53 h78.74
  text "A" at 2597.13,2223.03 h39.37 r90
  text "B" at 2682.13,2223.03 h39.37 r90
  text "C" at 2767.13,2223.03 h39.37 r90
  text "ALVC164245" at 946.29,1967.47 h39.37
  text "HCT238" at 2185.04,1937.01 h39.37 r90
  text "HCT245" at 2248.03,1374.02 h39.37 r90
  text "HCT245" at 2244.09,448.82 h39.37 r90
  text "HC02" at 1452.76,141.73 h39.37 r90
  text "HC4040" at 1811.02,125.98 h39.37 r90
Bottom Overlay:
  text ".Project_Title" at 798.23,1815.94 h118.11 r90
  text "(C) IanJ '26" at 954.57,1407.32 h40 r90
  text ".PCB_RevNo" at 798.23,766.73 h118.11 r90
Board Shape:
  lines w10: 2952.76,0 70.87,0 70.87,2409.45 2807.09,2409.45 2952.76,2263.78
Mechanical 13:
  lines w10: -3.78,-65.12 -3.78,-45.12 ; 56.22,-75.12 -3.78,-55.12 ; 56.22,-35.12 -3.78,-55.12 ; 1076.72,-55.12 -3.78,-55.12 ; 1868.47,-55.12 2948.97,-55.12 ; 2888.97,-75.12 2948.97,-55.12 ; 2888.97,-35.12 2948.97,-55.12 ; 2948.97,-65.12 2948.97,-45.12 ; 2988.07,2349.38 3007.87,2409.45 ; 2991.93,1192.77 3012.13,1132.83 ; 2992.13,60.94 3012.13,0.94 ; 2992.13,1072.83 3012.13,1132.83 ; 2997.87,2409.42 3017.87,2409.48 ; 3002.13,0.94 3022.13,0.94 ; 3002.13,1132.8 3022.13,1132.87 3002.13,1132.83 ; 3008.71,2157.02 3007.87,2409.45 ; 3011.29,1385.26 3012.13,1132.83 ; 3012.13,216 3012.13,0.94 ; 3012.13,917.78 3012.13,1132.83 ; 3028.07,2349.52 3007.87,2409.45 ; 3031.93,1192.9 3012.13,1132.83 ; 3032.13,60.94 3012.13,0.94 ; 3032.13,1072.83 3012.13,1132.83
  text "1276.621 (mil)" at 2972.76,2146.9 h60 r270.19
  text "1131.89 (mil)" at 3048.12,226 h60 r90
  text "2952.756 (mil)" at 1086.72,-91.11 h60